# Altium PCB E-22 Blaster Bit.PcbDoc
Units mil, origin at the board's own origin, x right, y up, seen from the top; angles counter-clockwise.
Board outline 646.31 x 801.5 mil, 2 copper layers (Top Layer, Bottom Layer); 7 components, 5 nets, 22 pads, 0 vias.
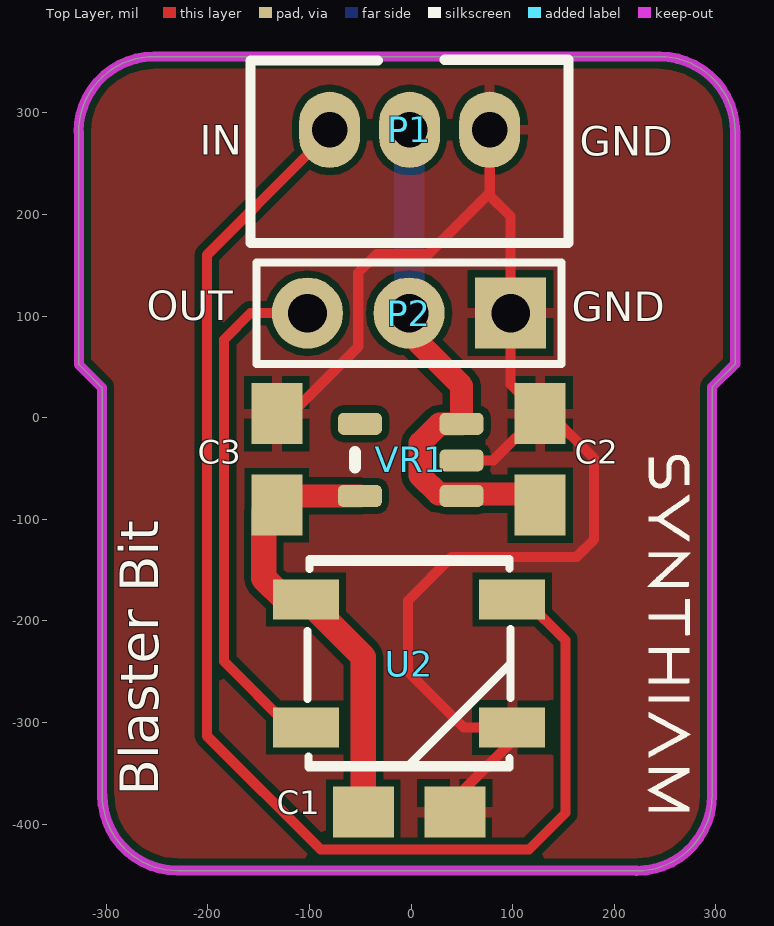
[diagram p0: Top Layer view]
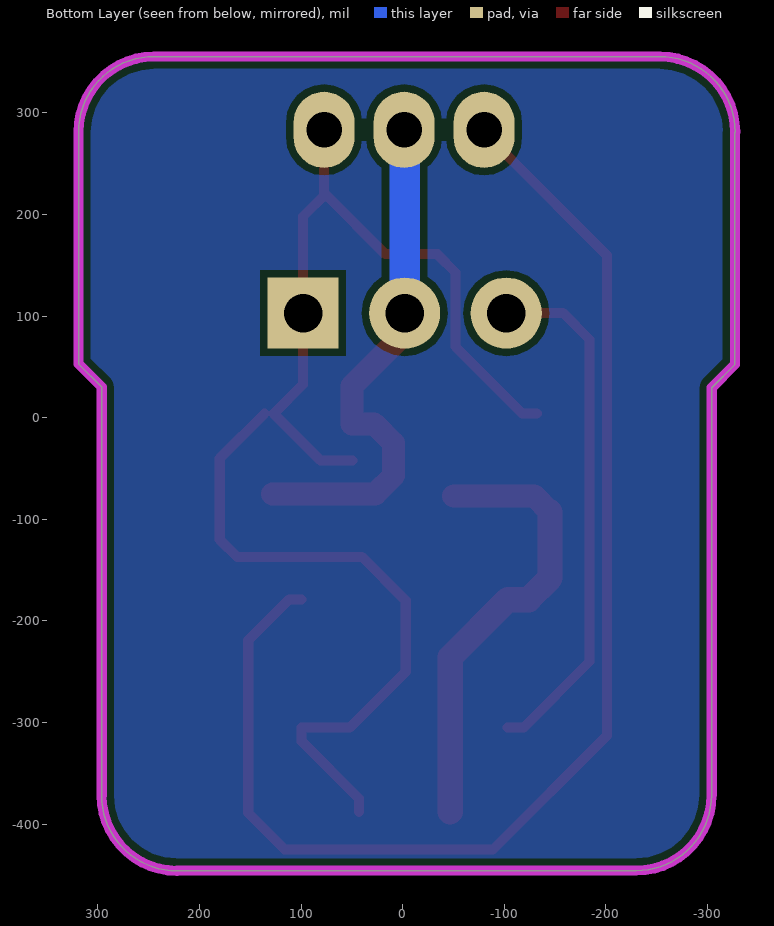
[diagram p1: Bottom Layer view, seen from below]

## Layer stack, top to bottom
Top Layer: signal copper 1.4
Dielectric: dielectric 12.6, FR-4, Dk 4.8
Bottom Layer: signal copper 1.4

## Board outline
-327,52.31 -304.19,29.5 -304.19,-371.5 -304,-371.5 ccw(c-229.69,-371.5) -229.69,-445.81 222,-445.81 222,-446 ccw(c222,-371.69) 296.31,-371.69 296.19,-371.69 296.19,30.19 319,53 319,281.19 ccw(c244.69,281.19) 244.69,355.5 -253,355.5 ccw(c-253,281.19) -327.31,281.19 -327,281.19

## Design rules (kind name [scope] priority, off if disabled: settings)
Clearance [All] p1: gap=7
PolygonConnect [All] p1: connectstyle=Relief reliefconductorwidth=10 reliefentries=4 polygonreliefangle="90 Angle"
RoutingVias [All] p1: holewidth=28 width=50 viastyle="Through Hole" minholewidth=28 minwidth=50 maxholewidth=28 maxwidth=50
SMDNeckDown [All] p1: percent=200.000
SilkscreenOverComponentPads [All] p1: minsilkscreentomaskgap=10
SolderMaskExpansion [All] p1: expansion=4
Width Width_2 [InNet('VCC')] p1: maxlimit=40 minlimit=10 preferedwidth=30 minimp=50.000000 maximp=50.000000 favimp=50.000000
Width Width_1 [InNet('5V')] p2: maxlimit=50 minlimit=10 preferedwidth=25 minimp=50.000000 maximp=50.000000 favimp=50.000000
Width [All] p3: maxlimit=25 minlimit=7 preferedwidth=10 minimp=50.000000 maximp=50.000000 favimp=50.000000
27 further rules are at their usual default settings.

## Components (designator, comment, footprint, x,y, rotation, side; value= is the part's Value field where it differs from the comment)
C1 "18pF" "0805 TIGHT" -2,-388 r180 top
C2 "2.2uF" "0805 TIGHT" 127,-41 r90 top
C3 "100nF" "0805 TIGHT" -132,-41 r90 top
P1 "Header 3" "JST-PH 3-PIN" 136,341 r0 top
P2 "Header 3" HDR1X3 -102,103 r0 top
U2 "WS2812B" ws2812b -2,-242 r0 top
VR1 "5VREG" "SOT-25 New" -7.35,-42 r270 top

## Footprints (in the part's own frame and the unit in brackets; to place one, negate y for a bottom-side part, rotate by r counter-clockwise, add the part's x,y. Pads: shape width x height; smd on the part's side, far side on the other; paste and mask are expansions set on the pad)
"0805 TIGHT" [mil]
  rect 60x50 smd: 1(-45,0) 2(45,0)
HDR1X3 [mil] "Connector; Header; 3 Position"
  round 70 hole 38: 1(0,0) 2(100,0)
  rect 70x70 hole 38: 3(200,0)
  silkscreen extent -50,-50 250,50
"JST-PH 3-PIN" [mil]
  oval 60x75 hole 35: 1(-216.11,-57.64) 2(-137.37,-57.64) 3(-58.63,-57.64)
  silkscreen extent -294,-169 19,11
"SOT-25 New" [mm]
  rrect50% 0.55x1.1 smd: 1(-0.914,-1.092) 2(0.889,-1.092) 3(0,1.448) 4(-0.914,1.448) 5(0.889,1.448)
  silkscreen extent -0.2,-1.22 0.18,-1.22
ws2812b [mm]
  rect 1.651x1 smd: 1(-2.577,1.6) 2(-2.577,-1.6) 3(2.577,-1.6) 4(2.577,1.6)
  silkscreen extent -2.54,-2.59 2.54,2.62

## Part data
C1 C2 C3: library part Cap, "Capacitor"
P1 P2: "Header, 3-Pin"
VR1: library part "Vreg SOT25"

## Free pads (board coordinates)
  round 225 on Bottom Solder: 0(-2,-209)

## Nets (pads, with @x,y where several pads share a name; then routed paths per layer and width w, separated by ;. In a path a pad name is that pad's centre, name@x,y a point inside that pad or via, vN(x,y) a via of type N, cw(c..) or ccw(c..) an arc to the next point about the centre after c; other vN are vias at no path point)
5V: C1.2 C3.1 U2.1 VR1.2 | length 449.2
  Top Layer w22.74: C3.1@-145,-92.47 -129.53,-77 VR1.2
  Top Layer w25: C3.1@-145,-92.47 -145,-158 -123.99,-179.01 U2.1 -47,-235.46 C1.2
GND: C1.1 C2.2 C3.2 P1.3 P2.3 U2.3 VR1.3 | length 1391.2
  Top Layer w10: C3.2 -118,4 -52,70 -52,143 -34,161 17,161 76,220 98,198 P2.3 98,33 C2.2 81,-42 VR1.3 ; C1.1 43,-375 99.46,-318.54 U2.3 52,-304.99 -3.03,-249.96 -3.03,-180.03 40,-137 163,-137 180,-120 180,-40 C2.2@136,4 ; 77.37,218.63 P1.3@77.37,284.36
IN: P1.1 U2.4 | length 1266.4
  Top Layer w10: P1.1@-102,259 -201,160 -201,-313 -89,-425 116,-425 152,-389 152,-219.01 112,-179.01 U2.4
OUT: P2.1 U2.2 | length 521
  Top Layer w10: U2.2 -119.01,-304.99 -184,-240 -184,77 -158,103 -111,103 P2.1@-102,94
VCC: C2.1 P1.2 P2.2 VR1.4 VR1.5 | length 510.4
  Top Layer w22.74: P2.2 -2,83 49.65,31.35 VR1.4 28,-6 9,-25 9,-57 27,-75 C2.1@128,-75
  Bottom Layer w30: P2.2 P1.2@-2,276
pads on no net: VR1.1

## Polygon pours and split planes (outlines as drawn)
GND on Top Layer "Top Layer-VCC" (solid, pour order 3): -327,52.31 -304.19,29.5 -304.19,-371.5 -304,-371.5 ccw(c-229.69,-371.5) -229.69,-445.81 222,-445.81 222,-446 ccw(c222,-371.69) 296.31,-371.69 296.19,-371.69 296.19,30.19 319,53 319.77,280.45 ccw(c245.45,280.45) 245.45,354.77 -7,355.5 -253.45,354.77 ccw(c-253.45,280.45) -327.77,280.45 -327,208.19
no net on Bottom Layer "Top Layer-VCC" (solid, pour order 7): -327,52.31 -304.19,29.5 -304.19,-371.5 -304,-371.5 ccw(c-229.69,-371.5) -229.69,-445.81 222,-445.81 222,-446 ccw(c222,-371.69) 296.31,-371.69 296.19,-371.69 296.19,30.19 319,53 318.77,280.45 ccw(c244.45,280.45) 244.45,354.77 -6,355 -253.45,353.77 ccw(c-253.45,279.45) -327.77,279.45 -327,208.19

## Keep-outs
Keep-Out Layer:
  lines w10: -327.31,281.19 cw(c-253,281.19) -253,355.5 244.69,355.5 cw(c244.69,281.19) 319,281.19 319,53 296.19,30.19 296.19,-371.69 ; -327,281.19 -327,52.31 -304.19,29.5 -304.19,-371.5 ; -304,-371.5 ccw(c-229.69,-371.5) -229.69,-445.81 222,-445.81 ; 222,-446 ccw(c222,-371.69) 296.31,-371.69

## Silkscreen, mask and mechanical layers (free items; w line width, h text height)
Top Overlay:
  drawing of 2260 lines, arcs and shapes, not listed
  text "IN" at -208,249 h50
  text "GND" at 166,248 h50
  text "OUT" at -260,86 h50
  text "GND" at 158,85 h50
  text "Blaster Bit" at -236,-372 h65 r90
Bottom Solder:
  text ":)" at -36,-152 h150 r270